# Altium PCB High_Voltage_Driver.PcbDoc
Units mm, origin at the board's own origin, x right, y up, seen from the top; angles counter-clockwise.
Board outline 45 x 65 mm, 2 copper layers (Top Layer, Bottom Layer); 46 components, 36 nets, 160 pads, 36 vias.
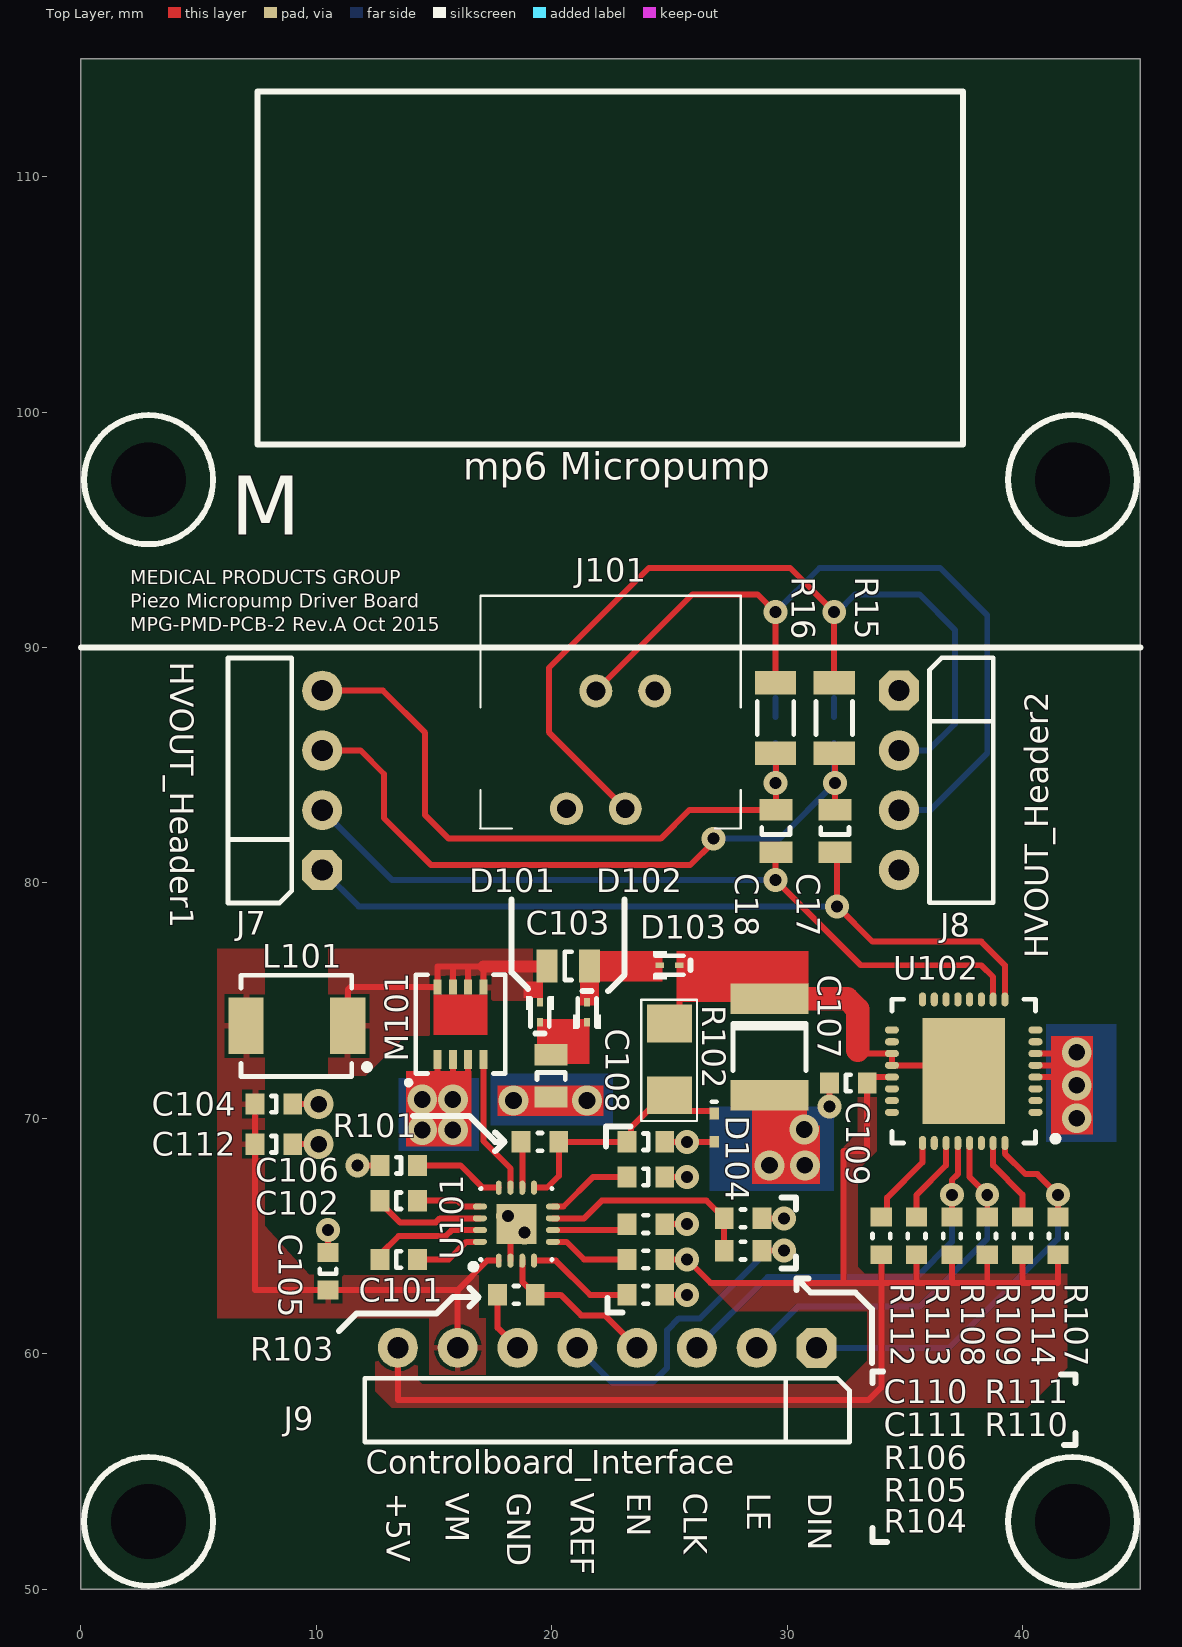
[diagram p0: Top Layer view]
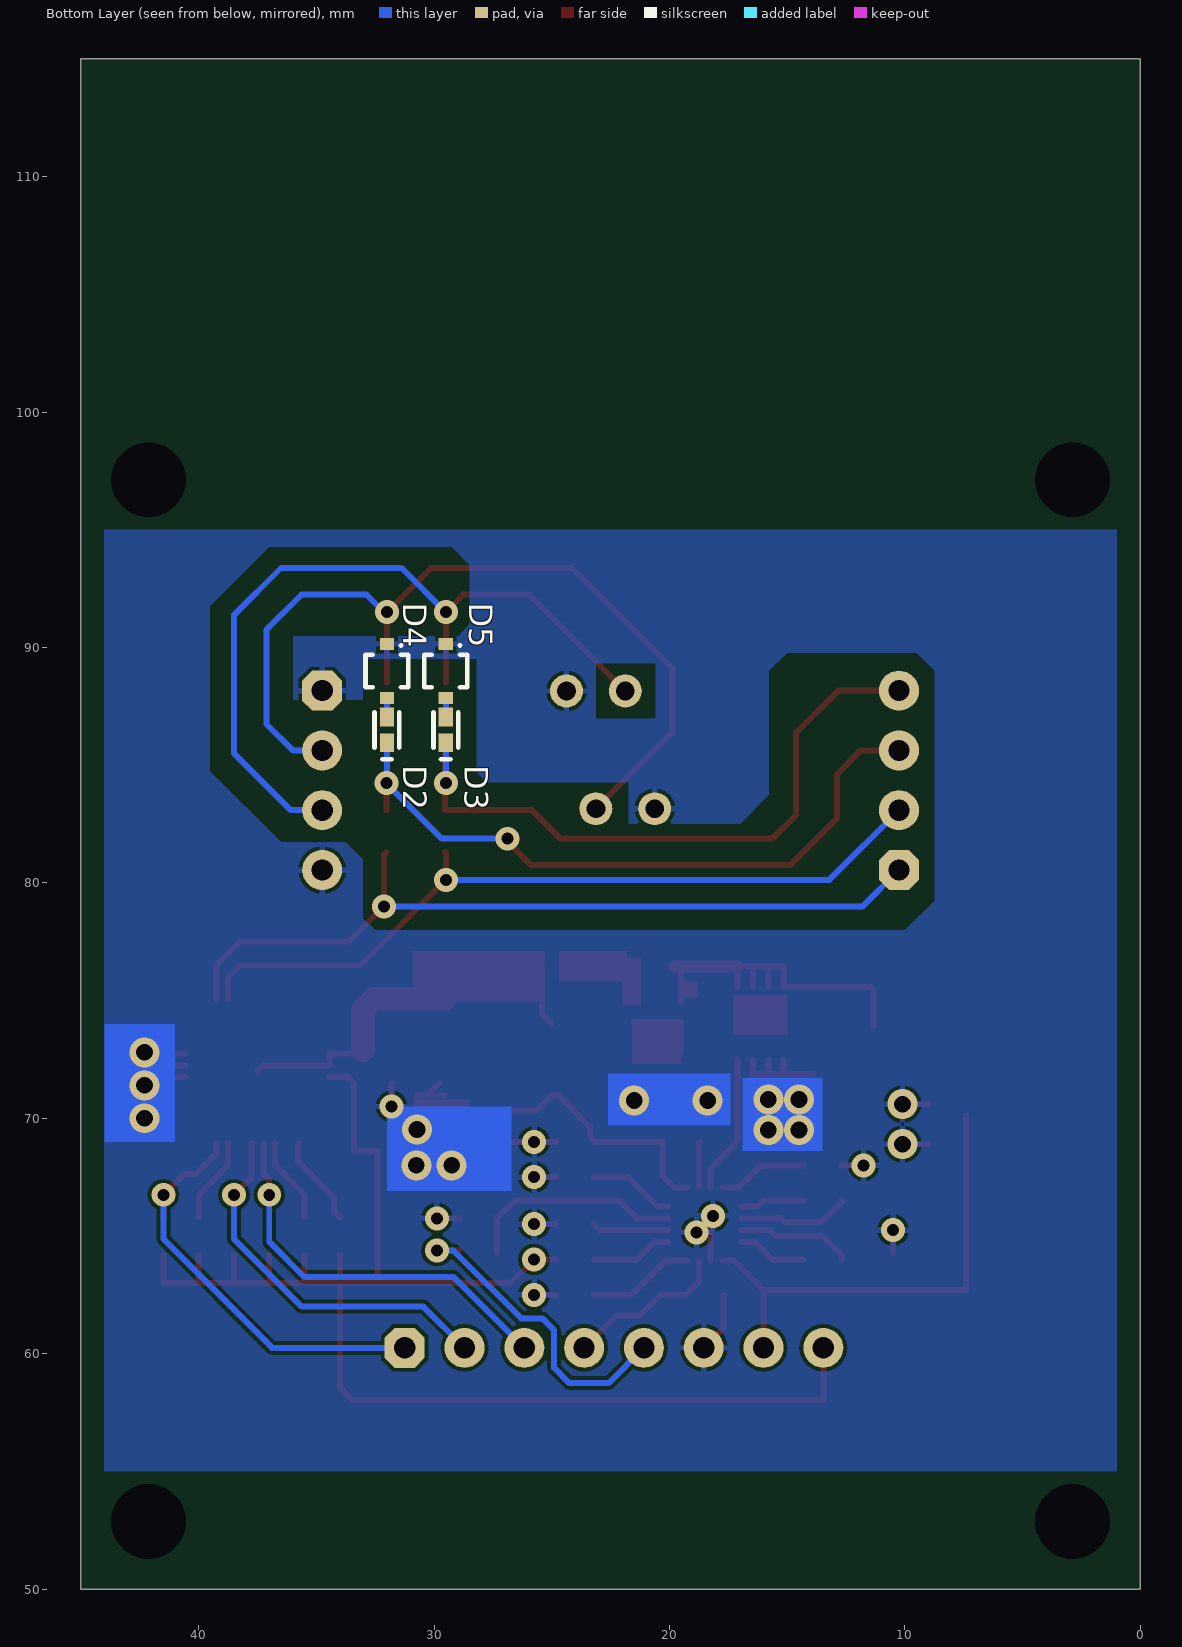
[diagram p1: Bottom Layer view, seen from below]
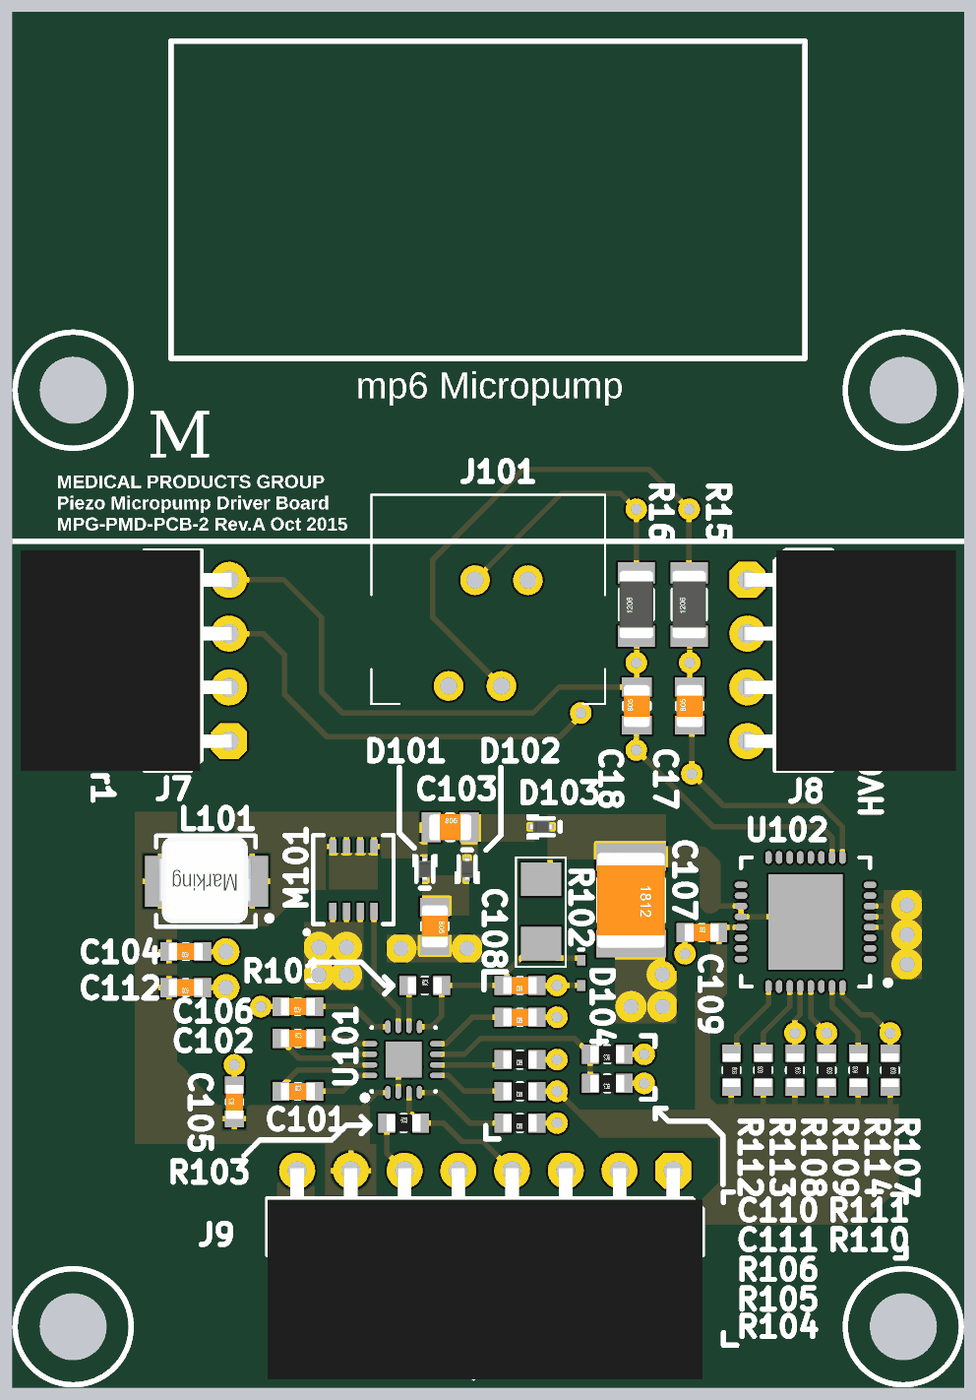
[diagram p2: 3D render of the assembled board from above, using the file's embedded part models]

## Layer stack, top to bottom
Top Layer: signal copper 0.0356
Dielectric: dielectric 0.32, FR-4, Dk 4.8
Bottom Layer: signal copper 0.0356

## Board outline
0,50 0,115 45,115 45,50

## Design rules (kind name [scope] priority, off if disabled: settings)
Clearance [All] p1: gap=0.153
FabricationTestPointUsage TestPointUsage [All] p1: valid=0 allowmultiple=FALSE
FabricationTestpoint Testpoint [All] p1: side=3 testpointundercomponent=TRUE minsize=1.016 maxsize=2.54 preferedsize=1.524 minholesize=0 maxholesize=1.016 preferedholesize=0.813 testpointgrid=0.025 allowsidetop=TRUE allowsidebottom=TRUE usegrid=TRUE gridtolerance=0
HoleSize [All] p1: absolutevalues=TRUE maxlimit=5 minlimit=0.457 maxpercent=80.000 minpercent=20.000
MinimumAnnularRing [All] p1: minimumring=0.254
PolygonConnect [All] p1: connectstyle=Relief reliefconductorwidth=0.254 reliefentries=4 polygonreliefangle="90 Angle"
RoutingVias [All] p1: holewidth=0.711 width=1.27 viastyle="Through Hole" minholewidth=0.711 minwidth=1.27 maxholewidth=0.711 maxwidth=1.27
SilkscreenOverComponentPads [IsPad] p1: minsilkscreentomaskgap=0.254
SolderMaskExpansion [All] p1: expansion=0.102
Width [All] p1: maxlimit=1 minlimit=0.127 preferedwidth=0.254
24 further rules are at their usual default settings.

## Components (designator, comment, footprint, x,y, rotation, side; value= is the part's Value field where it differs from the comment)
C17 "Capacitor 0.22uF 100V 0805" 0805 32,82 r90 top
C18 "Capacitor 0.22uF 100V 0805" 0805 29.5,82 r90 top
C101 "Capacitor NP" CAP_C_0603 13.5,64 r0 top
C102 "Capacitor NP" CAP_C_0603 13.5,66.5 r0 top
C103 "Capacitor 0.01uF 250V 0805" 0805 20.5,76.5 r0 top
C104 "Capacitor NP" CAP_C_0603 8.2,70.6 r180 top
C105 "Capacitor NP" CAP_C_0603 10.5,63.5 r90 top
C106 "Capacitor NP" CAP_C_0603 13.5,68 r180 top
C107 "Capacitor 0.47uF 250V 1812" 1812 29.2,73 r270 top
C108 "Capacitor 0.01uF 250V 0805" 0805 20,72 r270 top
C109 "Capacitor NP" CAP_C_0603 32.6,71.5 r0 top
C110 "Capacitor NP" CAP_C_0603 24,69 r180 top
C111 "Capacitor NP" CAP_C_0603 24,67.5 r180 top
C112 "Capacitor NP" CAP_C_0603 8.2,68.9 r180 top
D2 "300V" SC-79 32,86.5 r90 bottom
D3 "300V" SC-79 29.5,86.5 r90 bottom
D4 "47V" SOD-323 32,89 r270 bottom
D5 "47V" SOD-323 29.5,89 r270 bottom
D101 "120V" SOD-923 19.5,74.5 r90 top
D102 "120V" SOD-923 21.5,74.5 r270 top
D103 "120V" SOD-923 25,76.5 r180 top
D104 "5.1V" SSSMini2-F4-B 26.9,69.6 r270 top
J7 "HVOUT_Header1" HDR_F_2.54_1x4_RA 10.25,84.355 r90 top locked
J8 "HVOUT_Header2" HDR_F_2.54_1x4_RA 34.75,84.355 r270 top locked
J9 "Controlboard_Interface" HDR_F_2.54_1x8_RA 22.355,60.25 r180 top locked
J101 "CONN-FFC,FPC WM2850 1x4" "FFC - MOLEX 0039532044" 22.5,88.15 r90 top
L101 "Inductor 6.8uH  Wurth WE LHMI" Inductor-W-0.1uH 9.1,73.9 r180 top
M101 "BSZ900N15NS3" PG-TSDSON-8 16.2,74 r90 top
R15 "Resistor" RES_C_1206 32,87 r90 top
R16 "Resistor" RES_C_1206 29.5,87 r90 top
R101 "Resistor" RES_C_0603 19.5,69 r0 top
R102 "1206 500V Resistor" "RES 7.5M SMD 1206" 25,72.5 r90 top
R103 "Resistor" RES_C_0603 18.5,62.5 r0 top
R104 "Resistor" RES_C_0603 24,62.5 r180 top
R105 "Resistor" RES_C_0603 24,64 r180 top
R106 "Resistor" RES_C_0603 24,65.5 r180 top
R107 "Resistor" RES_C_0603 41.5,65 r270 top
R108 "Resistor" RES_C_0603 37,65 r270 top
R109 "Resistor" RES_C_0603 38.5,65 r270 top
R110 "Resistor" RES_C_0603 28.125,64.375 r180 top
R111 "Resistor" RES_C_0603 28.125,65.75 r180 top
R112 "Resistor" RES_C_0603 34,65 r270 top
R113 "Resistor" RES_C_0603 35.5,65 r90 top
R114 "Resistor" RES_C_0603 40,65 r90 top
U101 "HV9150 QFN-16" QFN-16(3X3) 18.5,65.5 r90 top
U102 "HV513" QFN-32(6X6) 37.5,72 r180 top

## Footprints (in the part's own frame and the unit in brackets; to place one, negate y for a bottom-side part, rotate by r counter-clockwise, add the part's x,y. Pads: shape width x height; smd on the part's side, far side on the other; paste and mask are expansions set on the pad)
0805 [mm]
  rect 0.9x1.4 smd: 1(-0.697,-0.025) 2(1.103,-0.025)
  silkscreen extent 0.05,-0.63 0.35,0.57, body extent -0.8,-0.65 1.2,0.6, height 0.78
1812 [mm]
  rect 1.3x3.3 smd: 1(-2.075,0.051) 2(2.025,0.051)
  silkscreen extent -1.03,-1.5 0.97,1.6, body extent -2.28,-1.55 2.22,1.65, height 1.6
CAP_C_0603 [mm] "Chip Capacitor, 2-Leads, Body 1.6x0.8mm, IPC Medium Density"
  rect 0.8x0.9 smd: 1(-0.8,0) 2(0.8,0)
  silkscreen extent -0.1,-0.35 0.1,0.35, body extent -0.8,-0.4 0.8,0.4, height 0.3
"FFC - MOLEX 0039532044" [mm] "1.2 FPC CONNECTOR"
  round 1.4 hole 0.8: 1(0,-1.875) 2(-5,-0.625) 3(0,0.625) 4(-5,1.875)
  silkscreen extent -5.84,-5.53 4.04,5.54, body extent -5.71,-5.21 1.78,5.21, height 2.7
HDR_F_2.54_1x4_RA [mm] "Header Female Right Angle 4 Way 2.54mm Pitch"
  oct 1.7x1.7 hole 0.9: 1(-3.81,0)
  round 1.7 hole 0.9: 2(-1.27,0) 3(1.27,0) 4(3.81,0)
  silkscreen extent -5.21,1.3 5.2,4, body extent -5.2,-0.2 5.21,9.86, height 2.52
HDR_F_2.54_1x8_RA [mm] "Header Female Right Angle 8 Way 2.54mm Pitch"
  oct 1.7x1.7 hole 0.9: 1(-8.89,0)
  round 1.7 hole 0.9: 2(-6.35,0) 3(-3.81,0) 4(-1.27,0) 5(1.27,0) 6(3.81,0) 7(6.35,0) 8(8.89,0)
  silkscreen extent -10.29,1.3 10.3,4, body extent -10.28,-0.2 10.29,9.86, height 2.52
Inductor-W-0.1uH [mm]
  rect 1.5x2.4 smd: 1(-2.237,-0.025) 2(2.084,-0.025)
  silkscreen extent -3.18,-2.18 2.3,2.12, body extent -2.22,-2.11 2.23,1.95, height 1.7
PG-TSDSON-8 [mm]
  rect 0.8x0.34 smd: 1(-1.5,1.051) 2(-1.5,0.401) 3(-1.5,-0.249) 4(-1.5,-0.899)
  rect 0.65x0.34 smd: 5(1.575,-0.899) 6(1.575,-0.249) 7(1.575,0.401) 8(1.575,1.051)
  Top Layer region: -0.461,1.221 -0.461,-1.069 1.249,-1.069 1.249,1.221
  silkscreen extent -2.56,-1.82 2.1,2.36, body extent -1.7,-1.62 1.7,1.78, height 1.1
QFN-16(3X3) [mm] "QFN, 16-Leads, Body 3.0x3.0mm (max), Pitch 0.50mm, IPC Medium Density"
  oval 0.6x0.25 smd: 1(-1.55,0.75) 2(-1.55,0.25) 3(-1.55,-0.25) 4(-1.55,-0.75) 9(1.55,-0.75) 10(1.55,-0.25) 11(1.55,0.25) 12(1.55,0.75)
  oval 0.25x0.6 smd: 5(-0.75,-1.55) 6(-0.25,-1.55) 7(0.25,-1.55) 8(0.75,-1.55) 13(0.75,1.55) 14(0.25,1.55) 15(-0.25,1.55) 16(-0.75,1.55)
  rect 1.7x1.7 smd: 17(0,0)
  silkscreen extent -1.93,-1.53 1.53,1.95, body extent -1.5,-1.5 1.5,1.5, height 1
QFN-32(6X6) [mm]
  oval 0.6x0.3 smd: 1(-3.05,1.75) 2(-3.05,1.25) 3(-3.05,0.75) 4(-3.05,0.25) 5(-3.05,-0.25) 6(-3.05,-0.75) 7(-3.05,-1.25) 8(-3.05,-1.75) 17(3.05,-1.75) 18(3.05,-1.25) 19(3.05,-0.75) 20(3.05,-0.25) 21(3.05,0.25) 22(3.05,0.75) 23(3.05,1.25) 24(3.05,1.75)
  oval 0.3x0.6 smd: 9(-1.75,-3.05) 10(-1.25,-3.05) 11(-0.75,-3.05) 12(-0.25,-3.05) 13(0.25,-3.05) 14(0.75,-3.05) 15(1.25,-3.05) 16(1.75,-3.05) 25(1.75,3.05) 26(1.25,3.05) 27(0.75,3.05) 28(0.25,3.05) 29(-0.25,3.05) 30(-0.75,3.05) 31(-1.25,3.05) 32(-1.75,3.05)
  rect 3.5x4.5 smd: 33(0,0)
  silkscreen extent -4.03,-3.05 3.05,3.05, body extent -3.05,-3.05 3.05,3.05, height 0.8
"RES 7.5M SMD 1206" [mm]
  rect 1.6x1.9 smd: 1(-1.525,0) 2(1.525,0)
  silkscreen extent -2.62,-1.17 2.54,1.19
RES_C_0603 [mm] "Chip Resistor, 2-Leads, Body 1.6x0.8mm, IPC Medium Density"
  rect 0.8x0.9 smd: 1(-0.8,0) 2(0.8,0)
  silkscreen extent -0.1,-0.38 0.1,0.38, body extent -0.8,-0.4 0.8,0.4, height 0.3
RES_C_1206 [mm] "Chip Resistor, 2-Leads, Body 3.2x1.6mm, IPC Medium Density"
  rect 1x1.75 smd: 1(-1.5,0) 2(1.5,0)
  silkscreen extent -0.7,-0.77 0.7,0.77, body extent -1.6,-0.8 1.6,0.8, height 1
SC-79 [mm] "Molded Diode, 2-Leads, Body 1.2x0.8mm, IPC Medium Density"
  rect 0.8x0.6 smd: 1(-0.55,0) 2(0.55,0)
  silkscreen extent -1.25,-0.53 0.75,0.53, body extent -0.63,-0.43 0.63,0.43, height 0.65
SOD-323 [mm]
  rect 0.5x0.6 smd: 1(-1.15,0) 2(1.15,0)
  silkscreen extent -1.13,-0.91 0.68,0.91, body extent -0.9,-0.67 0.9,0.67, height 1
SOD-923 [mm] "Diode SOD-923 Body L=.85, W= .65"
  rect 0.36x0.25 smd: 1(-0.42,0) 2(0.42,0)
  silkscreen extent -0.6,-0.6 0.7,0.6, body extent -0.5,-0.3 0.5,0.3, height 0.4
SSSMini2-F4-B [mm]
  rect 0.5x0.4 smd: 1(-0.599,0) 2(0.599,0)
  silkscreen extent -1.1,-0.1 -1.1,0.1, body extent -0.7,-0.3 0.7,0.3, height 0.52

## Part data
C101 C102: library part CAP1295, "Capacitor"
C104 C112: library part CAP1461, "Capacitor"
C105 C106 C109 C111: library part CAP0517, "Capacitor"
C110: library part CAP1424, "Capacitor"
D2 D3: library part Diode-BAS521-50ns-300V, "BAS521- Single high-voltage switching diode 300V"
D4 D5: library part ZenerDiode-47V, "Zener Diode 47V - BZX384-B47 - Voltage regulator diode +/-2%"
D101 D102 D103: library part "Diode-Ultra Fast Speed-4ns-120V", "Diode-Ultra Fast Speed-4ns-120V"
D104: library part "ZenerDiode_5.1V [SSSMini2-F4-B]", "ZenerDiode 5.1V"
J7 J8: library part CON1287
J9: library part CON1288
J101: library part "CONN-FFC,FPC TOP4POS 1.25MM RA 1x4", "CONN-FFC,FPC TOP4POS 1.25MM RA 1x4"
L101: "Inductor-6.8uH Wurth WE LHMI SMD Low Profile High Current Molded Inductor"
M101: "Power Transistor-150V"
R15 R16: library part RES1231
R101: library part RSMT0489
R102: library part Resistor-7.5M_[1206], "Resistor-7.5M"
R103 R104 R105 R112 R113 R114: library part RES1066
R106: library part RSMT0411
R107 R108 R109: library part RSMT0382
R110 R111: library part RES1368
U102: library part "HV513 QFN-32"

## Free pads (board coordinates)
  round 0.762 hole 3.175 unplated: 0(2.875,52.875) 0(2.875,97.125) 0(42.125,52.875) 0(42.125,97.125)

## Via types
v1: diameter 1.016, hole 0.508, Top Layer to Bottom Layer, 22 vias
v2: diameter 1.27, hole 0.711, Top Layer to Bottom Layer, 14 vias

## Nets (pads, with @x,y where several pads share a name; then routed paths per layer and width w, separated by ;. In a path a pad name is that pad's centre, name@x,y a point inside that pad or via, vN(x,y) a via of type N, cw(c..) or ccw(c..) an arc to the next point about the centre after c; other vN are vias at no path point)
0V: C104.1 C105.2 C106.2 C107.2 C108.2 C109.1 C110.1 C111.1 C112.1 D4.1 D5.1 D104.2 J8.1 J8.4 J9.6 J101.1 J101.4 M101.1 M101.2 M101.3 R103.1 R104.1 R106.1 R111.1 U101.2 U101.17 U102.4 U102.5 U102.6 | length 37.2
  Top Layer w0.254: C112.1 v2(10.1,68.9) ; C104.1 v2(10.1,70.6) ; C105.2 v1(10.5,65.25) ; v1(11.75,68) C106.2 ; 15.149,71.449 M101.1 ; v2(15.8,70.8) v2(15.8,70.8) ; M101.2 v2(15.8,70.8) ; M101.3 16.449,71.449 v2(15.8,70.8) ; R103.1 17.7,61.095 J9.6 ; U101.2 18.25,65.25 U101.17 ; v2(18.375,70.75) 19.828,70.75 C108.2 20.121,70.75 v2(21.5,70.75) ; R104.1 v1(25.75,62.5) ; R106.1 v1(25.75,65.5) ; C111.1 v1(25.75,67.5) ; C110.1 v1(25.75,69) ; v1(25.75,69) D104.2 ; R111.1 v1(29.875,65.75) ; v2(29.25,68) v2(30.75,68) v2@30.75,69.5 ; C107.2@29.551,70.975 C107.2@30.3,70.975 ; C107.2@29.775,71.5 C107.2@30.3,70.975 ; C107.2@30.4,70.975 C107.2@30.3,70.975 ; v2(30.725,69.525) 30.725,70.975 C107.2@30.3,70.975 ; v1(31.8,70.5) 31.8,70.3 C109.1 ; U102.4 v2@42,71.75 ; U102.5 v2@42,72.25 ; U102.6 v2@42,72.75 ; v2(42.3,70) v2(42.3,71.4) v2(42.3,72.8)
  other v1: 18.85,65.15 18.15,65.85
  other v2: 14.5,69.5 15.8,69.5 14.5,70.8
5.0V: C109.2 J9.8 R105.1 R107.2 R108.2 R109.2 R112.2 R113.1 R114.1 U102.21 | length 62.4
  Top Layer w0.254: J9.8 13.465,58.035 33.465,58.035 34,58.57 34,63 ; R105.1 v1(25.75,64) 26.75,63 34,63 ; 32.4,63 32.4,68.6 33.4,68.6 C109.2 33.65,71.75 U102.21 ; R112.2 34,63 ; R113.1 35.5,63 ; R108.2 37,63 ; R109.2 38.5,63 ; R114.1 40,63 ; R107.2 41.5,63 40,63 ; 34,63 35.5,63 ; 35.5,63 37,63 ; 37,63 38.5,63 ; 38.5,63 40,63
BL: R112.1 U102.25 | length 3.9
  Top Layer w0.254: R112.1 34.25,66.05 34.25,66.625 35.75,68.125 U102.25
CLK: J9.3 R108.1 U102.28 | length 18
  Top Layer w0.254: R108.1 v1(37,66.75) 37,67.375 37.25,67.625 U102.28
  Bottom Layer w0.254: J9.3 29.165,63.25 35.5,63.25 37,64.75 v1(37,66.75)
DIN: J9.1 R107.1 U102.32 | length 18.4
  Top Layer w0.254: U102.32 39.25,68.5 40.125,67.625 40.625,67.625 v1(41.5,66.75) R107.1
  Bottom Layer w0.254: J9.1 36.875,60.25 41.5,64.875 v1(41.5,66.75)
HI-Z: R114.2 U102.31 | length 3.7
  Top Layer w0.254: U102.31 38.75,68 39.994,66.756 39.994,65.806 R114.2
HVOUT1: C17.1 J7.1 U102.9 | length 34.5
  Top Layer w0.254: C17.1 32.125,81.204 v1(32.125,79) 33.625,77.5 38.25,77.5 39.25,76.5 U102.9
  Bottom Layer w0.254: J7.1 11.795,79 v1(32.125,79)
HVOUT2: C18.1 J7.2 U102.10 | length 33.6
  Top Layer w0.254: C18.1 29.5,81.278 v1(29.5,80.125) 33.125,76.5 38.25,76.5 38.75,76 U102.10
  Bottom Layer w0.254: J7.2 13.21,80.125 v1(29.5,80.125)
LE: J9.2 R109.1 U102.29 | length 17
  Top Layer w0.254: U102.29 37.75,67.5 v1(38.5,66.75) R109.1
  Bottom Layer w0.254: J9.2 30.455,62 35.625,62 38.5,64.875 v1(38.5,66.75)
NetC17_2: C17.2 D2.1 J7.3 R15.1 | length 30.5
  Top Layer w0.254: J7.3 11.875,85.625 12.875,84.625 12.875,82.75 14.875,80.75 25.875,80.75 26.875,81.75 v1(26.875,81.875) ; R15.1 32.025,85.475 v1(32.025,84.25) C17.2
  Bottom Layer w0.254: v1(26.875,81.875) 29.676,81.875 v1@32.025,84.225 ; D2.1 32,84.275 v1(32.025,84.25)
NetC18_2: C18.2 D3.1 J7.4 R16.1 | length 28.5
  Top Layer w0.254: J7.4 12.835,88.165 14.625,86.375 14.625,82.875 15.625,81.875 24.625,81.875 25.853,83.103 C18.2 29.525,85.475 R16.1
  Bottom Layer w0.254: v1(29.5,84.25) D3.1
NetC101_1: C101.1 U101.15 | length 4.9
  Top Layer w0.254: C101.1 12.7,64.2 13.5,65 15.5,65 15.75,65.25 U101.15
NetC101_2: C101.2 U101.16 | length 3
  Top Layer w0.254: C101.2 15.625,64 16.375,64.75 U101.16
NetC102_1: C102.1 U101.14 | length 4.7
  Top Layer w0.254: C102.1 12.7,66.425 13.55,65.575 15.075,65.575 15.25,65.75 U101.14
NetC102_2: C102.2 U101.13 | length 2.8
  Top Layer w0.254: C102.2 16,66.5 16.25,66.25 U101.13
NetC103_1: C103.1 D101.2 L101.1 M101.5 M101.6 M101.7 M101.8 | length 14.8
  Top Layer w0.254: L101.1 11.337,75.463 11.448,75.575 M101.8 15.149,76.451 15.8,76.451 ; M101.7 15.799,76.45 15.8,76.451 ; M101.6 16.449,76.402 16.4,76.451 ; M101.5 17.099,76.45 17.1,76.451 16.4,76.451 ; D101.2 C103.1@19.5,76.171 ; C103.1@19.78,76.451 C103.1 ; 15.8,76.451 16.4,76.451
  Top Layer w0.5: 17.1,76.451 C103.1@19.78,76.451
NetC103_2: C103.2 D102.1 D103.2 | length 4.6
  Top Layer w0.254: D102.1 21.5,76.371 C103.2 21.629,76.5 D103.2
NetC106_1: C106.1 U101.12 | length 3.8
  Top Layer w0.254: C106.1 16.125,68 17.075,67.05 U101.12
NetC107_1: C107.1 D103.1 R102.2 U102.19 U102.20 U102.33 | length 17.3
  Top Layer w0.254: R102.2 25.42,74.445 25.42,75.125 ; D103.1 25.42,75.125 ; C107.1@29.551,75.075 25.47,75.075 25.42,75.125 ; 33,72.9 33.15,72.75 U102.19 U102.20 37.25,72.25 U102.33
  Top Layer w1: C107.1@29.551,75.075 32.55,75.075 33,74.625 33,72.9
NetC108_1: C108.1 D101.1 D102.2 | length 3.8
  Top Layer w0.254: C108.1 19.553,72.697 19.5,72.75 D101.1 D102.2
NetC110_2: C110.2 D104.1 R101.2 R102.1 U101.9 | length 11.6
  Top Layer w0.254: U101.9 19.8,67.05 20.3,67.55 R101.2 C110.2 23.375,69.175 23.375,69.625 24.725,70.975 R102.1 ; R102.1@25.6,70.375 R102.1 ; D104.1 26.799,70.3 25.675,70.3 R102.1
NetC111_2: C111.2 U101.8 | length 3.7
  Top Layer w0.254: U101.8 20.5,66.25 21.75,67.5 C111.2
NetD2_2: D2.2 D4.2 | length 0.8
  Bottom Layer w0.254: D2.2 D4.2
NetD3_2: D3.2 D5.2 | length 0.8
  Bottom Layer w0.254: D3.2 D5.2
NetJ8_2: J8.2 J101.2 R15.2 | length 37.9
  Top Layer w0.254: J101.2 19.875,86.4 19.875,89.125 24.125,93.375 30.125,93.375 v1(32,91.5) R15.2
  Bottom Layer w0.254: v1(32,91.5) 32.125,91.5 32.875,92.25 35.625,92.25 37.125,90.75 37.125,86.75 36,85.625 J8.2
NetJ8_3: J8.3 J101.3 R16.2 | length 33.9
  Top Layer w0.254: J101.3 25.975,92.25 28.75,92.25 v1(29.5,91.5) R16.2
  Bottom Layer w0.254: v1(29.5,91.5) 31.375,93.375 36.5,93.375 38.5,91.375 38.5,85.5 36.085,83.085 J8.3
NetJ9_4: J9.4 R103.2 U101.3 | length 6.9
  Top Layer w0.254: U101.3 18.75,63.05 R103.2 20.375,62.5 21.25,61.625 22.25,61.625 J9.4
NetJ9_5: J9.5 R110.1 | length 13.6
  Top Layer w0.254: R110.1 v1(29.875,64.375)
  Bottom Layer w0.254: J9.5 22.585,58.75 24.25,58.75 24.9,59.4 24.9,61 25.4,61.5 26.3,61.5 29.175,64.375 v1(29.875,64.375)
NetM101_4: M101.4 U101.11 | length 5.9
  Top Layer w0.254: M101.4 17.1,72.499 17.1,69.025 18.25,67.875 U101.11
NetR101_1: R101.1 U101.10 | length 2
  Top Layer w0.254: R101.1 18.75,68.95 U101.10
NetR104_2: R104.2 U101.4 | length 4.6
  Top Layer w0.254: U101.4 20.175,63.95 21.625,62.5 R104.2
NetR105_2: R105.2 U101.5 | length 3.5
  Top Layer w0.254: U101.5 20.625,64.75 21.375,64 R105.2
NetR106_2: R106.2 U101.6 | length 3.3
  Top Layer w0.254: U101.6 22.95,65.25 R106.2
NetR110_2: R110.2 R111.2 U101.7 | length 9.6
  Top Layer w0.254: U101.7 21.375,65.75 22.125,66.5 26.575,66.5 R111.2 ; R111.2@27.2,65.875 R111.2 ; R110.2@27.325,64.25 R110.2 R111.2 ; R111.2@27.325,65.8 R111.2
POL: R113.2 U102.27 | length 3.7
  Top Layer w0.254: R113.2 35.5,66.75 36.75,68 U102.27
VMAIN: C104.2 C105.1 C112.2 J9.7 L101.2 U101.1 | length 20.6
  Top Layer w0.254: 7.4,62.7 C105.1 16,62.7 ; 7.4,62.8 7.4,70.1 ; J9.7 16,60.255 16,62.7 ; U101.1@17.744,63.95 17.25,63.95 16,62.7
pads on no net: U102.1 U102.2 U102.3 U102.7 U102.8 U102.11 U102.12 U102.13 U102.14 U102.15 U102.16 U102.17 U102.18 U102.22 U102.23 U102.24 U102.26 U102.30

## Polygon pours and split planes (outlines as drawn)
0V on Bottom Layer "Top Layer-No Net" (solid, pour order 1000): 1,95 44,95 44,55 1,55 1,95
VMAIN on Top Layer "Top Layer-No Net" (solid, pour order 1001): 5.8,77.2 7.8,77.2 7.8,65.425 9.7,63.353 16.9,63.334 16.9,61.5 17.2,61.5 17.2,59.1 14.8,59.1 14.8,61.5 5.8,61.5
5.0V on Top Layer "Top Layer-No Net" (solid, pour order 1003): 12.5,61.1 14.3,61.1 14.3,58.9 14.5,58.7 32.4,58.7 33.4,59.7 33.4,61.8 27.8,61.8 26.75,62.85 26.75,63 32.4,63 32.4,68.8 33,69.4 33,71.3 33.8,71.3 33.8,68.6 33,67.8 33,63.7 33.3,63.4 41.9,63.4 41.9,59.4 40.2,57.7 13.2,57.7 12.5,58.4
NetC103_1 on Top Layer "Top Layer-No Net" (solid, pour order 1000): 10.5,77.2 10.5,71.8 12.1,71.8 13.8,73.5 17.5,73.5 17.5,75 19.2,75 19.2,77.2

## Other copper
Top Layer:
  rectangle net 0V: 28.5,69.5 30.725,70.8
  rectangle net NetC103_1: 18.8,75.1 19.5,75.8
  rectangle net 0V: 13.8,68.8 16.6,72
  rectangle net NetC103_2: 21.2,74.8 22,76.8
  rectangle net NetC108_1: 19.5,72.3 21.6,74.08
  rectangle net 0V: 17.7,70.1 22.2,71.4
  rectangle net NetC103_2: 21.8,75.8 24.7,77.1
  rectangle net NetC107_1: 25.3,75.075 30.9,77.1
  rectangle net 0V: 28.5,67.2 31.4,69.7
  rectangle net 0V: 41.2,69.3 43,73.5
Bottom Layer:
  rectangle net 0V: 13.5,68.6 16.9,71.7
  rectangle net 0V: 41,69 44,74
  rectangle net 0V: 17.4,69.7 22.6,71.9
  rectangle net 0V: 26.7,66.9 32,70.5
  pour cut-out: 33,87.75 36,87.75 36,90.5 28.946,90.5 28.5,91 28.5,93.5 29.25,94.25 37,94.25 39.5,91.75 39.5,84.75 36.5,81.75 33.75,81.75 33,81 33,78.5 32.5,78 10,78 8.75,79.25 8.75,89 9.5,89.75 15,89.75 15.75,89 15.75,83.75 17,82.5 21.75,82.5 21.75,84.25 27.75,84.25 28.2,84.7 28.2,89.5 33,89.5
  pour cut-out: 23.1,87 23.1,89.3 20.6,89.3 20.6,87

## Silkscreen, mask and mechanical layers (free items; w line width, h text height)
Top Overlay:
  circle w0.254: c42.125,97.125 r2.74
  circle w0.254: c2.875,97.125 r2.74
  circle w0.254: c42.125,52.875 r2.74
  circle w0.254: c2.875,52.875 r2.74
  lines w0.254: 0,90 45,90 ; 14.1,70.1 16.5,70.1 17.6,69 18,69 ; 16.5,62 16.9,62.4 ; 16.5,62.8 16.9,62.4 ; 17.6,68.6 18,69 ; 17.6,69.4 18,69 ; 17.9,69 18,69 ; 18.3,79.3 18.3,76.2 19,75.5 ; 19.3,73.6 19.7,73.6 ; 21.3,75.4 21.7,75.4 ; 22.3,68.8 22.3,69.647 23.354,69.647 ; 22.375,62.375 22.375,61.75 23,61.75 ; 22.4,75.4 23.1,76.1 23.1,79.3 ; 25.9,76.3 25.9,76.7 ; 29.75,63.625 30.375,63.625 30.375,64.125 ; 29.75,66.625 30.375,66.625 30.375,66.125 ; 30.4,62.7 30.4,63.2 ; 30.9,63.2 30.4,63.2 ; 33.6,59.6 33.6,61.9 32.9,62.6 31,62.6 30.4,63.2 ; 33.625,52.6 33.625,52 34.25,52 ; 33.625,58.75 33.625,59.25 34.082,59.25 ; 41.624,59.125 42.25,59.125 42.25,58.75 ; 41.757,56.125 42.25,56.125 42.25,56.625 ; 10.953,60.954 10.954,60.954 ; 10.954,60.954 11.7,61.7 15.1,61.7 15.8,62.4 16.9,62.4 ; 18,69 18,69 ; 7.5,98.625 7.5,113.625 37.473,113.625 37.473,98.625 7.5,98.625
  text "mp6 Micropump" at 16.25,96.75 h2
  text "M" at 6.375,93.95 h4.3
  text "MEDICAL PRODUCTS GROUP" at 2.1,92.5 h1
  text "Piezo Micropump Driver Board" at 2.1,91.5 h1
  text "MPG-PMD-PCB-2 Rev.A Oct 2015" at 2.1,90.5 h1
  text "+5V" at 13,54.1 h1 r270
  text "VM" at 15.5,54.1 h1 r270
  text "GND" at 18.1,54.1 h1 r270
  text "VREF" at 20.8,54.1 h1 r270
  text "EN" at 23.2,54.1 h1 r270
  text "CLK" at 25.6,54.1 h1 r270
  text "LE" at 28.3,54.1 h1 r270
  text "DIN" at 30.9,54.1 h1 r270
  text "1" at 0.375,26.625 h1.5
  text "1" at 7.875,26.625 h1.5
Mechanical 1:
  lines w0.254: -0.508,51.524 0,50 ; -0.508,88.476 0,90 ; -0.508,91.524 0,90 ; -0.508,113.476 0,115 ; -0.254,50 0.254,50 ; -0.254,115 0.254,115 ; 0,60.453 0,50 ; 0,79.547 0,90 ; 0,93.08 0,90 ; 0,111.92 0,115 ; 0,114.746 0,115.254 ; 0.508,51.524 0,50 ; 0.508,88.476 0,90 ; 0.508,91.524 0,90 ; 0.508,113.476 0,115 ; 1.524,114.492 0,115 ; 1.524,115.508 0,115 ; 6.992,100.024 7.5,98.5 ; 6.992,111.976 7.5,113.5 ; 7.246,98.5 7.754,98.5 ; 7.246,113.5 7.754,113.5 ; 7.5,101.023 7.5,98.5 ; 7.5,110.977 7.5,113.5 ; 7.5,113.246 7.5,113.754 ; 8.008,100.024 7.5,98.5 ; 8.008,111.976 7.5,113.5 ; 9.024,112.992 7.5,113.5 ; 9.024,114.008 7.5,113.5 ; 17.396,113.5 7.5,113.5 ; 17.396,115 0,115 ; 21.992,88.101 22.5,89.625 ; 21.992,100.149 22.5,98.625 ; 22.246,89.625 22.754,89.625 ; 22.246,98.625 22.754,98.625 ; 22.5,0 22.5,115 ; 22.5,87.085 22.5,89.625 ; 22.5,101.165 22.5,98.625 ; 23.008,88.101 22.5,89.625 ; 23.008,100.149 22.5,98.625 ; 27.604,113.5 37.5,113.5 ; 27.604,115 45,115 ; 35.976,112.992 37.5,113.5 ; 35.976,114.008 37.5,113.5 ; 37.5,113.246 37.5,113.754 ; 43.476,114.492 45,115 ; 43.476,115.508 45,115 ; 45,114.746 45,115.254 ; -0.254,90 0.254,90 -0.254,90
  text "45 (mm)" at 17.65,114.086 h1.52
  text "30 (mm)" at 17.65,112.586 h1.52
  text "15 (mm)" at 8.414,101.277 h1.52 r90
  text "25.00001 (mm)" at 0.914,93.334 h1.52 r90
  text "9 (mm)" at 26.157,90.037 h1.52 r90
  text "40.00002 (mm)" at 0.914,60.707 h1.52 r90
Mechanical 16:
  drawing of 1874 lines, arcs and shapes, not listed
  text "1" at -84.411,135.259 h1.78
  text "3" at 61.385,135.259 h1.78
  text "4" at 134.283,135.259 h1.78
  text "2" at -11.75,135.125 h1.78
  text "A" at -118.752,112.247 h1.78
  text "A" at 168.268,112.247 h1.78
  text "B" at -118.752,64.19 h1.78
  text "B" at 168.268,64.19 h1.78
  text "C" at -118.752,15.676 h1.78
  text "ENGINEER:" at 53.333,-21.332 h1.14
  text "TITLE:" at 91.433,-21.332 h1.14
  text "PCB DESIGNER:" at 53.333,-28.825 h1.14
  text "D" at -118.752,-32.33 h1.78
  text "D" at 168.268,-32.33 h1.78
  text "DATE:" at 53.333,-36.572 h1.14
  text "PART NO.:" at 91.433,-36.572 h1.14
  text "REV:" at 144.773,-36.572 h1.14
  text "Altium Limited" at 20.313,-39.112 h1.78
  text ".PRINT_DATE" at 54.603,-39.62 h1.78
  text "12a Rodborough Rd" at 20.313,-41.652 h1.78
  text "Frenchs Forest" at 20.313,-44.192 h1.78
  text "FILE NAME:" at 53.333,-44.192 h1.14
  text "DWG NO:" at 91.433,-44.192 h1.14
  text "SCALE:" at 144.773,-44.192 h1.14
  text "NSW 2086" at 20.313,-46.732 h1.78
  text ".PCB_FILE_NAME_NO_PATH" at 54.603,-47.24 h1.78
  text "1" at -84.411,-52.701 h1.78
  text "2" at -11.767,-52.701 h1.78
  text "3" at 61.385,-52.701 h1.78
  text "4" at 134.283,-52.701 h1.78